# Altium PCB PCB1.PcbDoc
Units mil, origin at the board's own origin, x right, y up, seen from the top; angles counter-clockwise.
Board outline 6000 x 4000 mil, 2 copper layers (Top Layer, Bottom Layer); 26 components, 52 nets, 164 pads, 0 vias.
Unrouted connection lines stored in the file: 86.
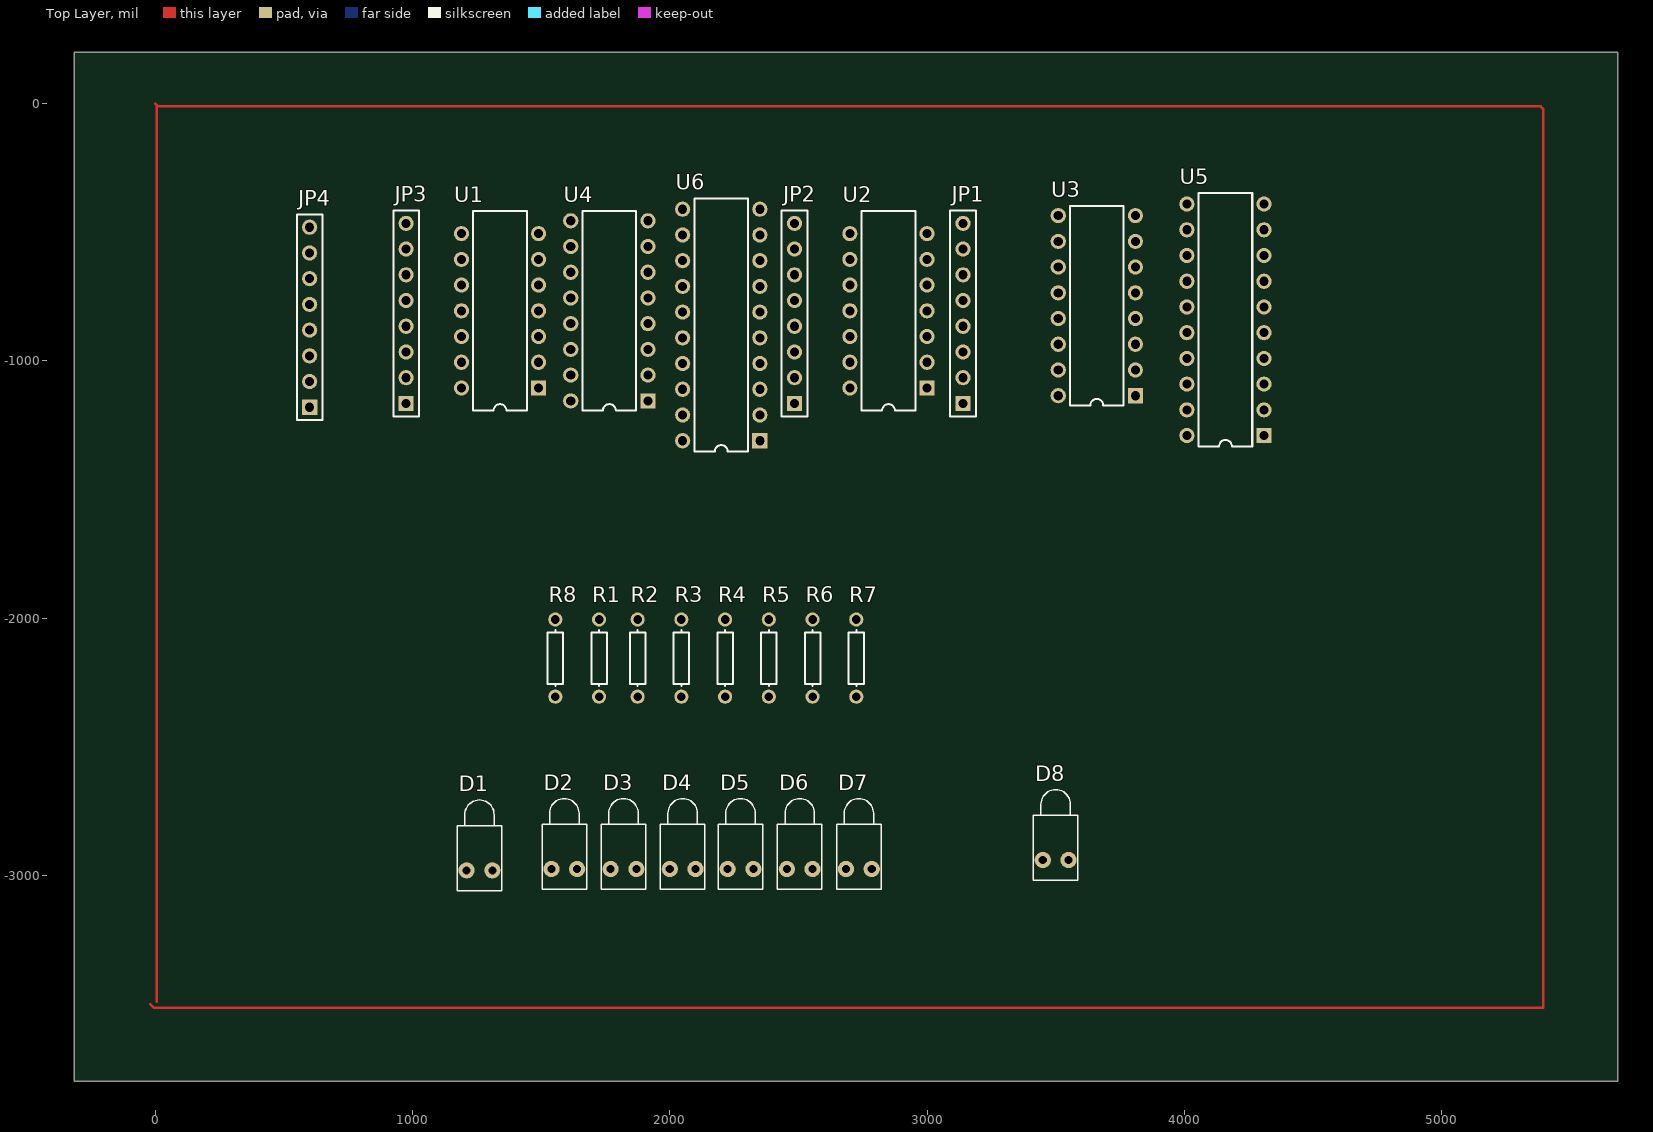
[diagram p0: Top Layer view]
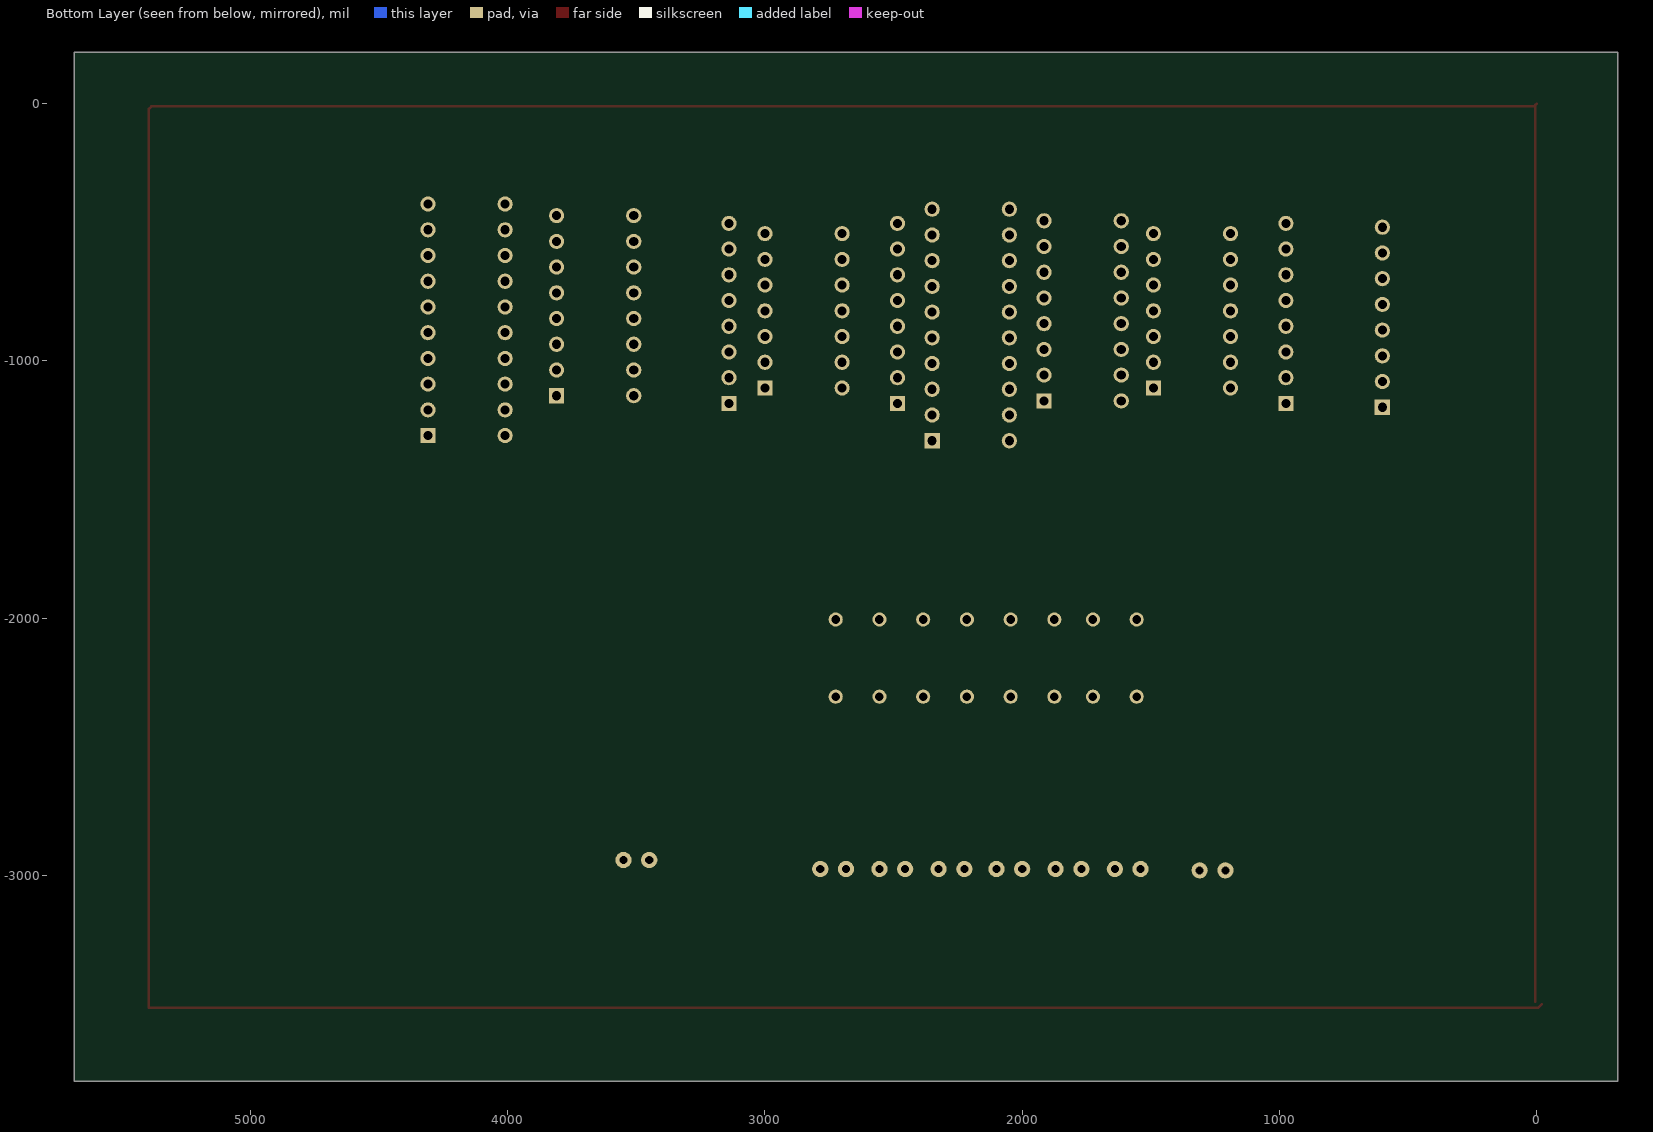
[diagram p1: Bottom Layer view, seen from below]

## Layer stack, top to bottom
Top Layer: signal copper 1.4
Dielectric: dielectric 12.6, FR-4, Dk 4.8
Bottom Layer: signal copper 1.4

## Board outline
-315,-3800 5685,-3800 5685,200 -315,200

## Design rules (kind name [scope] priority, off if disabled: settings)
Clearance [All] p1: gap=10
ComponentClearance [All] p1: gap=10 collisioncheckmode=0
PolygonConnect [All] p1: connectstyle=Relief reliefconductorwidth=10 reliefentries=4 polygonreliefangle="90 Angle"
RoomDefinition Sheet1 [InComponentClass('Sheet1')] p1: confinementstyle=ConfineIn formatcopy=TRUE lockcomponents=FALSE outline -1435,-1300 5155,-1300 5155,-190 -1435,-190
RoutingVias [All] p1: holewidth=28 width=50 viastyle="Through Hole" minholewidth=28 minwidth=50 maxholewidth=28 maxwidth=50
SolderMaskExpansion [All] p1: expansion=4
TestPointUsage [All] p1: valid=0 allowmultiple=FALSE
Testpoint [All] p1: side=15 testpointundercomponent=TRUE minsize=40 maxsize=100 preferedsize=60 minholesize=0 maxholesize=40 preferedholesize=32 testpointgrid=1 style=1023 order=1234567890
Width [All] p1: maxlimit=10 minlimit=10 preferedwidth=10
17 further rules are at their usual default settings.

## Components (designator, comment, footprint, x,y, rotation, side; value= is the part's Value field where it differs from the comment)
D1 "LED1" LED-1 1260,-2980 r90 top
D2 "LED1" LED-1 1590,-2975 r90 top
D3 "LED1" LED-1 1820,-2975 r90 top
D4 "LED1" LED-1 2050,-2975 r90 top
D5 "LED1" LED-1 2275,-2975 r90 top
D6 "LED1" LED-1 2505,-2975 r90 top
D7 "LED1" LED-1 2735,-2975 r90 top
D8 "LED1" LED-1 3500,-2940 r90 top
JP1 "Header 8" HDR1X8 3140,-1165 r90 top
JP2 "Header 8" HDR1X8 2485,-1165 r90 top
JP3 "Header 8" HDR1X8 975,-1165 r90 top
JP4 "Header 8" HDR1X8 600,-1180 r90 top
R1 "Res1" AXIAL-0.3 1725,-2155 r90 top
R2 "Res1" AXIAL-0.3 1875,-2155 r90 top
R3 "Res1" AXIAL-0.3 2045,-2155 r90 top
R4 "Res1" AXIAL-0.3 2215,-2155 r90 top
R5 "Res1" AXIAL-0.3 2385,-2155 r90 top
R6 "Res1" AXIAL-0.3 2555,-2155 r90 top
R7 "Res1" AXIAL-0.3 2725,-2155 r90 top
R8 "Res1" AXIAL-0.3 1555,-2155 r90 top
U1 "SN74LS32N" N014 1340,-805 r90 top
U2 "SN74LS08N" N014 2850,-805 r90 top
U3 "SN74LS138N" N016 3660,-785 r90 top
U4 "SN74LS138N" N016 1765,-805 r90 top
U5 "SN74LS244N" N020 4160,-840 r90 top
U6 "SN74LS374N" N020D 2200,-860 r90 top

## Footprints (in the part's own frame and the unit in brackets; to place one, negate y for a bottom-side part, rotate by r counter-clockwise, add the part's x,y. Pads: shape width x height; smd on the part's side, far side on the other; paste and mask are expansions set on the pad)
AXIAL-0.3 [mm] "Resistor; 2 Leads"
  round 1.4 hole 0.85: 1(-3.81,0) 2(3.81,0)
  silkscreen extent -2.77,-0.76 2.77,0.76
HDR1X8 [mm] "Connector; Header; 8 Position"
  rect 1.5x1.5 hole 0.9: 1(0,0)
  round 1.5 hole 0.9: 2(2.54,0) 3(5.08,0) 4(7.62,0) 5(10.16,0) 6(12.7,0) 7(15.24,0) 8(17.78,0)
  silkscreen extent -1.27,-1.27 19.05,1.27
LED-1 [mm] "Typical RED GaAs LED; 2 Leads"
  round 1.6 hole 0.8: 1(0,1.27) 2(0,-1.27)
  silkscreen extent -2,-2.2 6.95,2.2
N014 [mm] "DIP; 14 Leads; Row Spacing 7.62 mm; Pitch 2.54 mm"
  rect 1.5x1.5 hole 0.9: 1(-7.62,-3.81)
  round 1.5 hole 0.9: 2(-5.08,-3.81) 3(-2.54,-3.81) 4(0,-3.81) 5(2.54,-3.81) 6(5.08,-3.81) 7(7.62,-3.81) 8(7.62,3.81) 9(5.08,3.81) 10(2.54,3.81) 11(0,3.81) 12(-2.54,3.81) 13(-5.08,3.81) 14(-7.62,3.81)
  silkscreen extent -9.85,-2.65 9.85,2.65
N016 [mm] "DIP; 16 Leads; Row Spacing 7.62 mm; Pitch 2.54 mm"
  rect 1.5x1.5 hole 0.9: 1(-8.89,-3.81)
  round 1.5 hole 0.9: 2(-6.35,-3.81) 3(-3.81,-3.81) 4(-1.27,-3.81) 5(1.27,-3.81) 6(3.81,-3.81) 7(6.35,-3.81) 8(8.89,-3.81) 9(8.89,3.81) 10(6.35,3.81) 11(3.81,3.81) 12(1.27,3.81) 13(-1.27,3.81) 14(-3.81,3.81) 15(-6.35,3.81) 16(-8.89,3.81)
  silkscreen extent -9.85,-2.65 9.85,2.65
N020 [mm] "DIP; 20 Leads; Row Spacing 7.62 mm; Pitch 2.54 mm"
  rect 1.5x1.5 hole 0.9: 1(-11.43,-3.81)
  round 1.5 hole 0.9: 2(-8.89,-3.81) 3(-6.35,-3.81) 4(-3.81,-3.81) 5(-1.27,-3.81) 6(1.27,-3.81) 7(3.81,-3.81) 8(6.35,-3.81) 9(8.89,-3.81) 10(11.43,-3.81) 11(11.43,3.81) 12(8.89,3.81) 13(6.35,3.81) 14(3.81,3.81) 15(1.27,3.81) 16(-1.27,3.81) 17(-3.81,3.81) 18(-6.35,3.81) 19(-8.89,3.81) 20(-11.43,3.81)
  silkscreen extent -12.5,-2.65 12.5,2.65
N020D [mm] "DIP; 20 Leads; Row Spacing 7.62 mm; Pitch 2.54 mm"
  rect 1.5x1.5 hole 0.9: 1(-11.43,-3.81)
  round 1.5 hole 0.9: 2(-8.89,-3.81) 3(-6.35,-3.81) 4(-3.81,-3.81) 5(-1.27,-3.81) 6(1.27,-3.81) 7(3.81,-3.81) 8(6.35,-3.81) 9(8.89,-3.81) 10(11.43,-3.81) 11(11.43,3.81) 12(8.89,3.81) 13(6.35,3.81) 14(3.81,3.81) 15(1.27,3.81) 16(-1.27,3.81) 17(-3.81,3.81) 18(-6.35,3.81) 19(-8.89,3.81) 20(-11.43,3.81)
  silkscreen extent -12.5,-2.65 12.5,2.65

## Part data
D1 D2 D3 D4 D5 D6 D7 D8: "Typical RED GaAs LED"
JP1 JP2 JP3 JP4: "Header, 8-Pin"
R1 R2 R3 R4 R5 R6 R7 R8: "Resistor"
U1: "Quadruple 2-Input Positive-OR Gate"
U2: "Quadruple 2-Input Positive-AND Gate"
U3 U4: "3-Line to 8-Line Decoder / Demultiplexer"
U5: "Octal Buffer and Line Driver with 3-State Outputs"
U6: "Octal D-Type Transparent Latches and Edge-Triggered Flip-Flop"

## Nets (pads, with @x,y where several pads share a name; then routed paths per layer and width w, separated by ;. In a path a pad name is that pad's centre, name@x,y a point inside that pad or via, vN(x,y) a via of type N, cw(c..) or ccw(c..) an arc to the next point about the centre after c; other vN are vias at no path point)
A2: JP2.1 U4.3
A3: JP2.2 U4.2
A4: JP2.3 U4.1
A5: JP2.4 U3.4
A6: JP2.5 U3.6
A7: JP2.6 U3.3
A8: JP2.7 U3.2
A9: JP2.8 U3.1
AEN: JP3.5 U1.2
D0: JP1.8 U5.3 U6.3
D1: JP1.7 U5.5 U6.4
D2: JP1.6 U5.7 U6.7
D3: JP1.5 U5.9 U6.8
D4: JP1.4 U5.12 U6.13
D5: JP1.3 U5.14 U6.14
D6: JP1.2 U5.16 U6.17
D7: JP1.1 U5.18 U6.18
DEN: JP3.4 U1.3 U4.4
DIR: JP3.8 U1.4
GND: JP3.1 JP3.2 U1.7 U2.7 U3.8 U4.5 U4.8 U5.10 U6.1 U6.10
IOR: JP3.7 U2.1
IOW: JP3.6 U1.10 U2.2
NetD1_2: D1.2 R1.2
NetD2_2: D2.2 R2.1
NetD3_2: D3.2 R3.1
NetD4_2: D4.2 R4.1
NetD5_2: D5.2 R5.1
NetD6_2: D6.2 R6.1
NetD7_2: D7.2 R7.1
NetD8_2: D8.2 R8.1
NetU1_1: U1.1 U3.11
NetU1_5: U1.5 U1.9 U4.15
NetU1_6: U1.6 U5.1 U5.19
NetU1_8: U1.8 U6.11
NetU2_3: U2.3 U3.5
OUT0: R1.1 U6.2
OUT1: R2.2 U6.5
OUT2: R3.2 U6.6
OUT3: R4.2 U6.9
OUT4: R5.2 U6.12
OUT5: R6.2 U6.15
OUT6: R7.2 U6.16
OUT7: R8.2 U6.19
SW0: JP4.8 U5.17
SW1: JP4.7 U5.15
SW2: JP4.6 U5.13
SW3: JP4.5 U5.11
SW4: JP4.4 U5.8
SW5: JP4.3 U5.6
SW6: JP4.2 U5.4
SW7: JP4.1 U5.2
VCC: D1.1 D2.1 D3.1 D4.1 D5.1 D6.1 D7.1 D8.1 JP3.3 U1.14 U2.14 U3.16 U4.6 U4.16 U5.20 U6.20
pads on no net: U1.11 U1.12 U1.13 U2.4 U2.5 U2.6 U2.8 U2.9 U2.10 U2.11 U2.12 U2.13 U3.7 U3.9 U3.10 U3.12 U3.13 U3.14 U3.15 U4.7 U4.9 U4.10 U4.11 U4.12 U4.13 U4.14
copper on no net: | length 17811.6
  Top Layer w10: -20,-3500 -5,-3515 5395,-3515 5395,-20 5385,-10 10,-10 0,0 5,-5 5,-3490

## Silkscreen, mask and mechanical layers (free items; w line width, h text height)
Mechanical 1:
  lines w10: -100,-3585 -105,-3590 5490,-3590 5505,-3605 5505,105 5500,110 -100,110 -95,105 -95,90 -95,-3590